# EAGLE board Lora RFM95 Shield- 915 MHZ v1.0  (EAGLE 6.1)
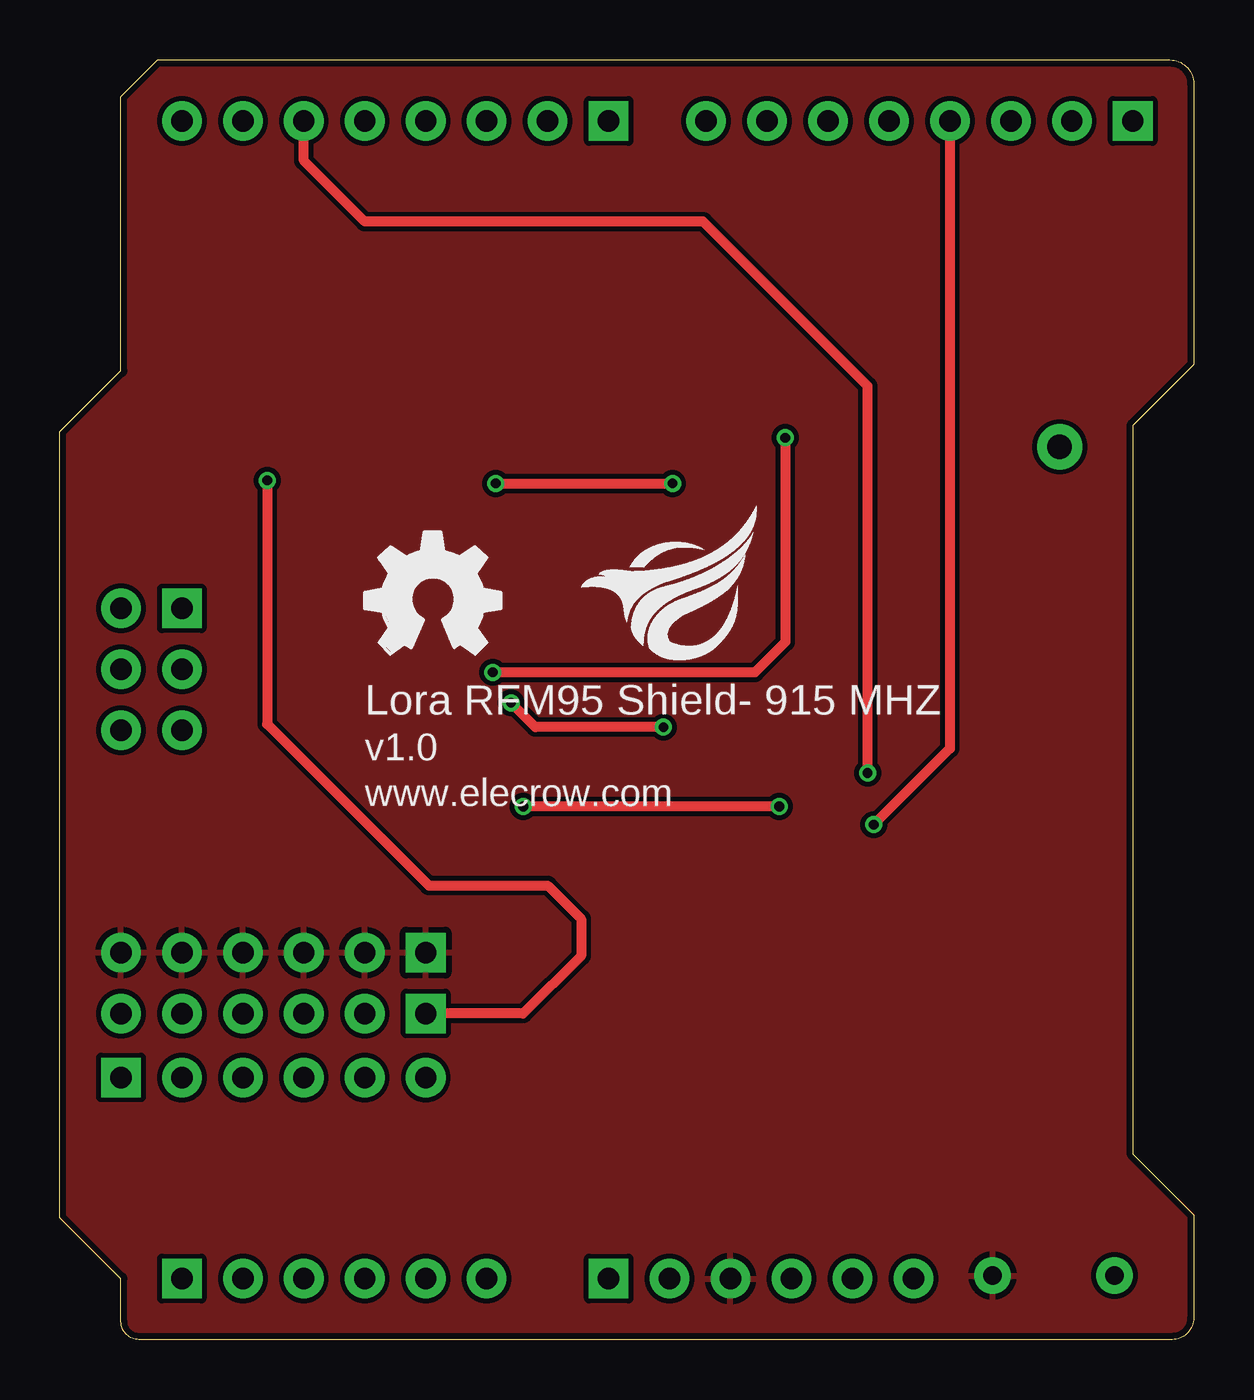
[diagram p0: board, top side]
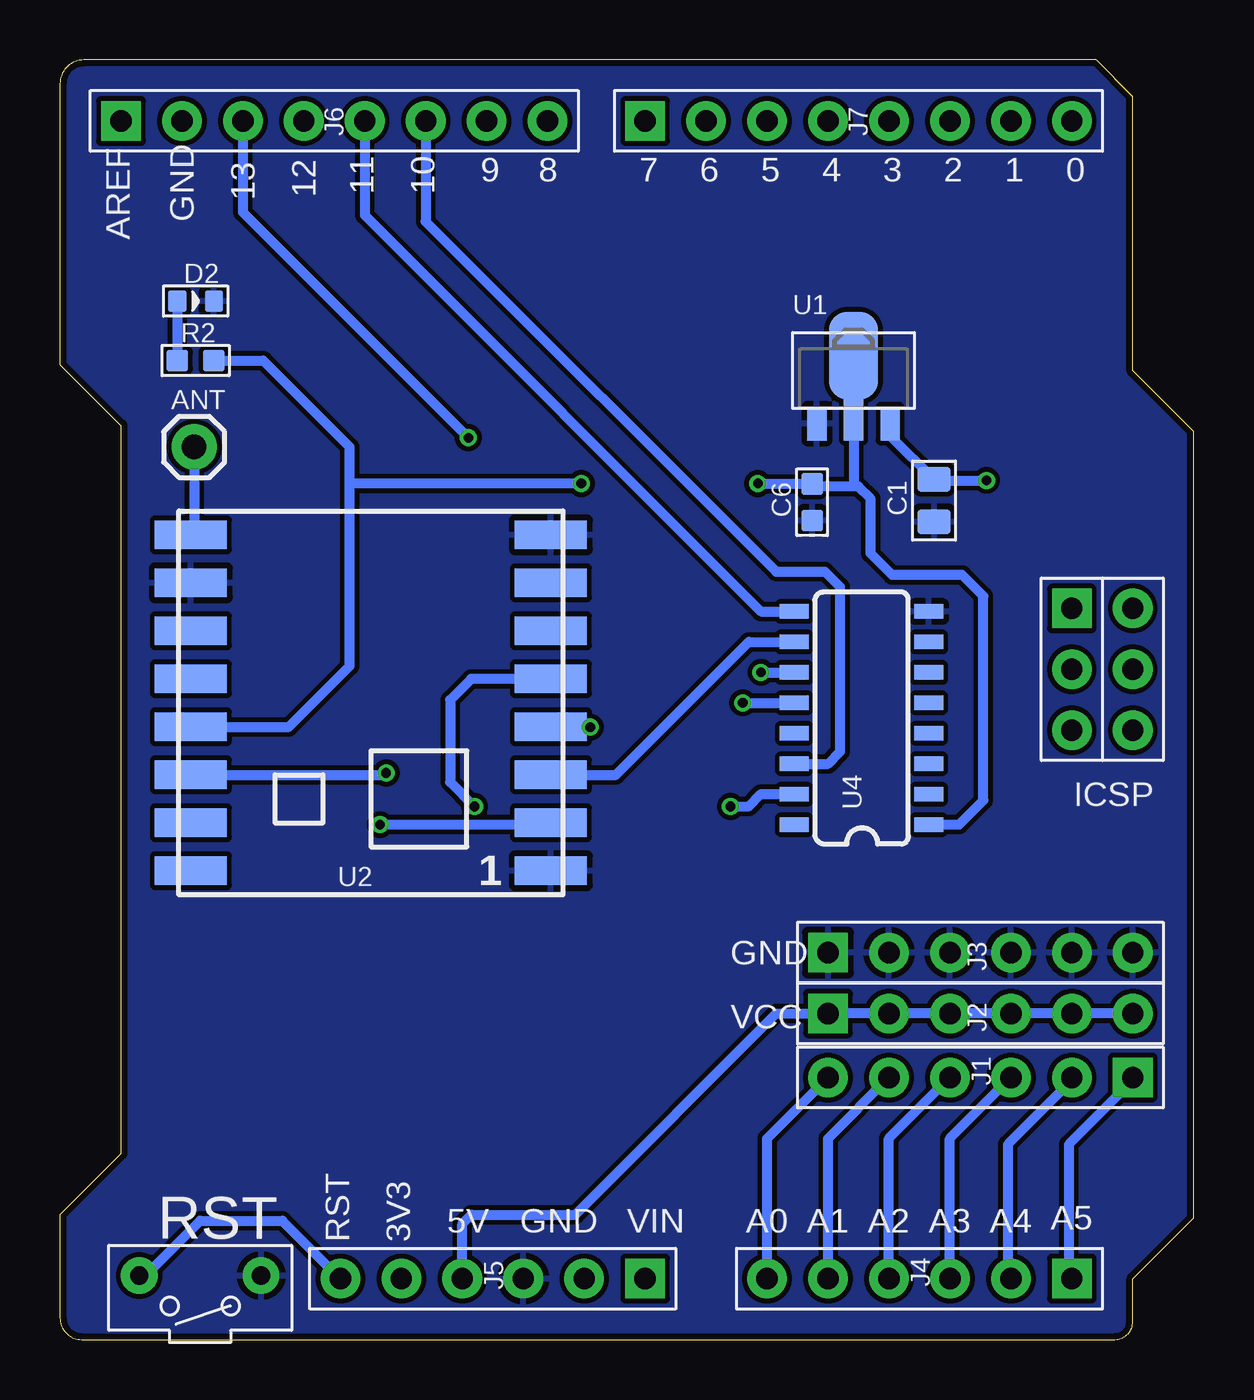
[diagram p1: board, bottom side, seen from below]

Size 47.24 x 53.34 mm. Coordinates in mm from the lower left corner, seen from the top.
Outline: 4.06,53.34 46.25,53.34 arc-90 47.24,52.35 47.24,40.64 44.7,38.1 44.7,7.75 47.24,5.21 47.24,0.9 arc-90 46.35,0 3.28,0 arc-90 2.54,0.74 2.54,2.54 0,5.08 0,37.85 2.54,40.39 2.54,51.82 4.06,53.34
Copper layers (1*16): Top 0.035mm / dielectric 1.5mm / Bottom 0.035mm
Design rules: minimum track width 6mil, minimum drill 12mil, track to track 6mil, track to pad 6mil, pad to pad 6mil, via to via 6mil, smd to smd 0mil, copper to edge 10mil, drill to drill 10mil, minimum pad ring 10mil, minimum via ring 6mil, stop-mask expansion 2mil, vias tented up to drill 100mil, thermal gap 10mil

## Footprints (pad centres in the part's own frame; a part is rotated, then mirrored left to right if it is on the bottom)
1X01 = drill 1.016 pad 1.88: 1 0,0
C0805 = smd 1.016 x 1.397: 1 -0.889,0; 2 0.889,0
C0603 = smd 0.889 x 0.889: 1 -0.762,0; 2 0.762,0
LED-0603 = smd 0.762 x 0.889: + -0.762,0; - 0.762,0
6P-2.54-65/35MIL = drill 0.889 pad 1.651 square: 1 0,6.35 | drill 0.889 pad 1.651: 2 0,3.81; 3 0,1.27; 4 0,-1.27; 5 0,-3.81; 6 0,-6.35
8P-2.54-65/35MIL = drill 0.889 pad 1.651 square: 1 0,8.89 | drill 0.889 pad 1.651: 2 0,6.35; 3 0,3.81; 4 0,1.27; 5 0,-1.27; 6 0,-3.81; 7 0,-6.35; 8 0,-8.89
2X3P-2.54-65/35MIL = drill 0.889 pad 1.651 square: 1 -1.27,2.54 | drill 0.889 pad 1.651: 2 -1.27,0; 3 -1.27,-2.54; 4 1.27,-2.54; 5 1.27,0; 6 1.27,2.54
R0603 = smd 0.889 x 0.889: 1 -0.762,0; 2 0.762,0
2P-7.62X3.56-90D = drill 0.762 pad 1.524: P$1 0,2.54; P$2 0,-2.54
SOT89 = smd 0.8 x 1.4: 1 -1.524,-1.905; 3 1.524,-1.905 | smd 0.8 x 1.9: 2 0,-1.651 | smd 2.032 x 3.65: 4 0,0.94
RFM69HCW-XXXS2 = smd 3 x 1.2: 1 -7.5,7; 2 -7.5,5; 3 -7.5,3; 4 -7.5,1; 5 -7.5,-1; 6 -7.5,-3; 7 -7.5,-5; 8 -7.5,-7; 9 7.5,-7; 10 7.5,-5; 11 7.5,-3; 12 7.5,-1; 13 7.5,1; 14 7.5,3; 15 7.5,5; 16 7.5,7
SO016 = smd 0.6 x 1.2: 1 -4.445,-2.8; 2 -3.175,-2.8; 3 -1.905,-2.8; 4 -0.635,-2.8; 5 0.635,-2.8; 6 1.905,-2.8; 7 3.175,-2.8; 8 4.445,-2.8; 9 4.445,2.8; 10 3.175,2.8; 11 1.905,2.8; 12 0.635,2.8; 13 -0.635,2.8; 14 -1.905,2.8; 15 -3.175,2.8; 16 -4.445,2.8

## Placement (x,y rotation side)
ANT  Antenna  [1X01]  41.66,37.21 0 bottom
C1  10uF  [C0805]  10.82,34.97 90 bottom
C6  0.1uF  [C0603]  15.9,34.91 90 bottom
D2  RED  [LED-0603]  41.59,43.29 0 bottom
J1  [6P-2.54-65/35MIL]  8.89,10.92 270 bottom
J2  [6P-2.54-65/35MIL]  8.89,13.59 90 bottom
J3  [6P-2.54-65/35MIL]  8.89,16.13 90 bottom
J4  [6P-2.54-65/35MIL]  11.43,2.54 270 bottom
J5  [6P-2.54-65/35MIL]  29.21,2.54 270 bottom
J6  [8P-2.54-65/35MIL]  35.81,50.8 90 bottom
J7  [8P-2.54-65/35MIL]  13.97,50.8 90 bottom
J8  [2X3P-2.54-65/35MIL]  3.81,27.94 0 bottom
R2  330  [R0603]  41.59,40.81 0 bottom
RST  K1  [2P-7.62X3.56-90D]  41.4,2.67 270 bottom
U1  [SOT89]  14.18,40.08 0 bottom
U2  RFM69HCW  [RFM69HCW-XXXS2]  34.29,26.54 180 bottom
U4  74HC4050 LVL CONVERTER  [SO016]  13.84,25.91 90 bottom
U$1  [OSHW_FILLX200_NOTEXT]  12.7,28.57 0 top
U$4  [ELECROW_NRW_6]  21.72,28.32 0 top

## Library data of the parts
ANT U4 = SparkFun
C1 C6 D2 R2 RST = Discrete
J1-J8 = Connector
U1 = IC
U2 = mike-temp
U$1 = logo
U$4 = ELECROW

## Nets
3.3V: C6.2 R2.2 U1.2 U1.4 U2.13 U4.1
3V-MOSI: U2.3 U4.10
3V-NSS: U2.5 U4.15
3V-SCK: U2.4 U4.12
5V-MISO: J6.4 U2.2
5V-MOSI: J6.5 U4.9
5V-NSS: J6.6 U4.14
5V-SCK: J6.3 U4.11
DPIO0: J7.6 U2.14
GND: C1.1 C6.1 D2.- J3.1 J3.2 J3.3 J3.4 J3.5 J3.6 J5.3 RST.P$1 U1.1 U2.1 U2.8 U2.10 U4.8
N$1: ANT.1 U2.9
N$2: D2.+ R2.1
N$7: J5.6 RST.P$2
N$10: J5.1
PC0: J1.6 J4.6
PC1: J1.5 J4.5
PC2: J1.4 J4.4
PC3: J1.3 J4.3
PC4: J1.2 J4.2
PC5: J1.1 J4.1
VCC: C1.2 J2.1 J2.2 J2.3 J2.4 J2.5 J2.6 J5.4 U1.3

## Tracks (layer width: path | path; a pad name or v marks a point on that pad's centre or on a via)
3.3V  (via drill 0.41)
  Top 0.406: v18.16,35.69 v25.53,35.69
  Bottom 0.406: U1.4 U1.2 14.18,35.64 14.1,35.56 | 14.1,35.56 13.97,35.56 13.46,35.05 13.46,32.77 12.57,31.88 9.65,31.88 8.76,30.99 8.76,22.48 9.78,21.46 U4.1 | 14.1,35.56 15.79,35.56 C6.2 18.14,35.67 v18.16,35.69 | U2.13 37.7,25.54 35.18,28.07 35.18,35.56 | 35.18,35.56 35.18,37.21 38.78,40.81 R2.2 40.85,40.81 40.89,40.77 | v25.53,35.69 35.05,35.69 35.18,35.56
3V-MOSI
  Bottom 0.406: U2.3 24.08,23.54 18.54,29.08 U4.10
3V-NSS  (via drill 0.41)
  Top 0.406: v29.97,22.23 v19.3,22.23
  Bottom 0.406: U2.5 30.11,27.54 30.99,26.67 30.99,23.24 v29.97,22.23 | v19.3,22.23 18.54,22.23 18.03,22.73 U4.15
3V-SCK  (via drill 0.41)
  Top 0.406: v25.15,25.53 19.81,25.53 v18.8,26.54
  Bottom 0.406: U2.4 25.16,25.54 v25.15,25.53 | v18.8,26.54 U4.12
5V-MISO  (via drill 0.41)
  Top 0.406: J6.4 37.08,24.64 v33.91,21.46
  Bottom 0.406: v33.91,21.46 26.87,21.46 U2.2
5V-MOSI
  Bottom 0.406: J6.5 34.54,46.86 18.03,30.35 U4.9
5V-NSS
  Bottom 0.406: U4.14 15.24,24 14.73,24.51 14.73,31.37 15.37,32 17.4,32 32,46.61 J6.6
5V-SCK  (via drill 0.41)
  Top 0.406: v30.23,37.59 30.23,29.08 28.96,27.81 v18.03,27.81
  Bottom 0.406: 16.51,27.81 U4.11 v18.03,27.81 | J6.3 39.62,46.99 v30.23,37.59
DPIO0  (via drill 0.41)
  Top 0.406: v33.66,23.62 33.66,39.75 26.8,46.61 12.7,46.61 10.16,49.15 J7.6
  Bottom 0.406: U2.14 33.73,23.54 v33.66,23.62
GND
  pour Top (isolate 0.203, rank 6): 47.5,53.34 -0.25,53.34 -0.25,0 47.5,0
  pour Bottom (isolate 0.203, rank 6): 0.51,53.34 -0.13,52.7 -0.13,2.29 2.16,0 47.5,0 47.5,52.7 46.86,53.34
N$1
  Bottom 0.406: ANT.1 41.66,33.4 41.79,33.4 U2.9
N$2
  Bottom 0.406: D2.+ R2.1
N$7
  Bottom 0.406: RST.P$2 43.69,2.67 41.4,4.95 37.97,4.95 J5.6
PC0
  Bottom 0.406: J4.6 17.78,8.38 J1.6
PC1
  Bottom 0.406: J4.5 15.24,8.38 J1.5
PC2
  Bottom 0.406: J4.4 12.7,8.38 J1.4
PC3
  Bottom 0.406: J4.3 10.16,8.38 J1.3
PC4
  Bottom 0.406: J1.2 5.08,10.79 7.75,8.13 7.75,2.67 J4.2
PC5
  Bottom 0.406: J1.1 2.54,10.79 5.21,8.13 5.21,2.67 J4.1
VCC  (via drill 0.41)
  Top 0.406: v8.64,35.81 8.64,25.65 15.37,18.92 20.32,18.92 21.72,17.53 21.72,16 19.3,13.59 J2.1
  Bottom 0.406: U1.3 12.65,37.67 10.82,35.84 | C1.2 10.82,35.84 | 10.82,35.84 10.79,35.81 v8.64,35.81 | J2.6 J2.5 J2.4 J2.3 J2.2 J2.1 17.4,13.59 25.78,5.21 30.1,5.21 30.48,4.83 J5.4

## Text on the board
tPlace: Lora RFM95 Shield- 915 MHZ | v1.0 | www.elecrow.com
bPlace: 0 | 1 | 2 | 3 | 4 | 5 | 6 | 7 | 8 | 9 | 10 | 11 | 12 | 13 | GND | AREF | ICSP | GND | VCC | A5 | A4 | A3 | A2 | A1 | A0 | VIN | GND | 5V | 3V3 | RST